# EAGLE board HW4 (EAGLE 9.6.2)
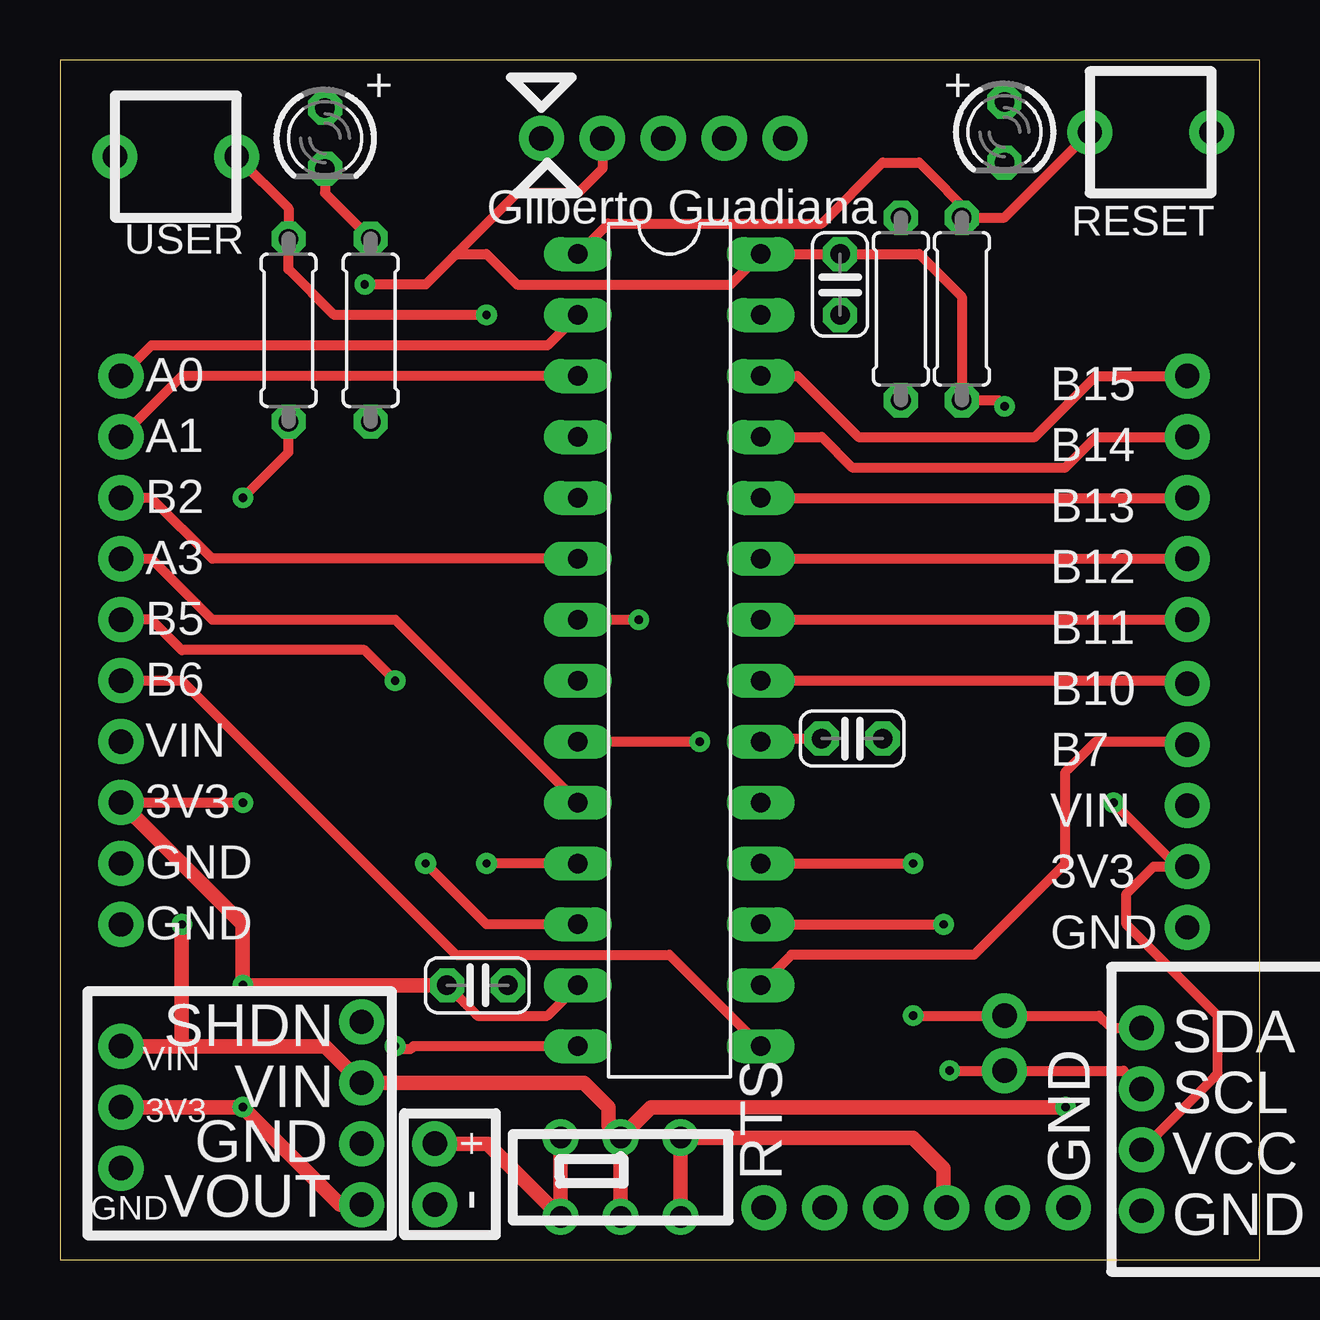
[diagram p0: board, top side]
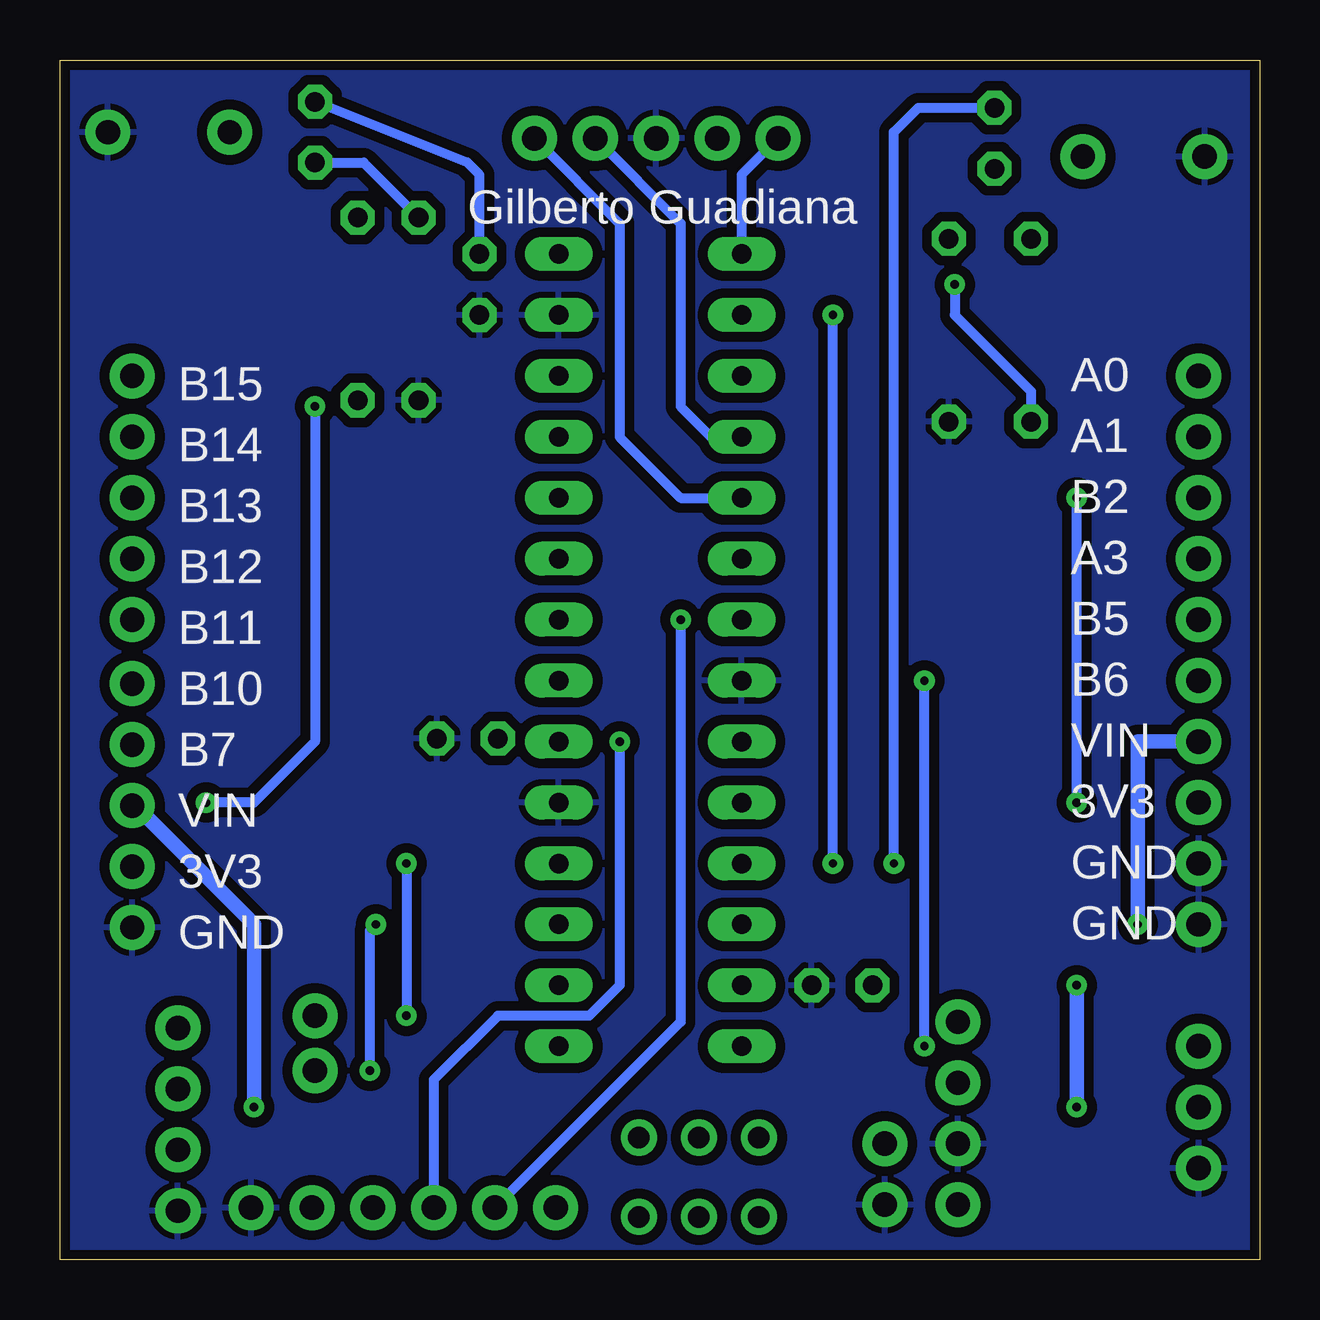
[diagram p1: board, bottom side, seen from below]

Size 50 x 50 mm. Coordinates in mm from the lower left corner, seen from the top.
Outline: 0,0 50,0 50,50 0,50 0,0
Copper layers (1*16): Top 0.035mm / dielectric 1.5mm / Bottom 0.035mm
Design rules "SparkFun": minimum track width 8mil, minimum drill 20mil, track to track 8mil, track to pad 8mil, pad to pad 8mil, via to via 8mil, smd to smd 8mil, copper to edge 8mil, drill to drill 8mil, minimum pad ring 12mil, minimum via ring 10mil, stop-mask expansion 4mil, vias tented up to drill 20mil, thermal gap 10mil

## Footprints (pad centres in the part's own frame; a part is rotated, then mirrored left to right if it is on the bottom)
C025-024X044 = drill 0.813 octagon: 1 -1.27,0; 2 1.27,0
LED3MM = drill 0.813 octagon: A -1.27,0; K 1.27,0
0207/7 = drill 0.813 octagon: 1 -3.81,0; 2 3.81,0
DIL28-3 = drill 0.813 long: 1 -16.51,-3.81; 2 -13.97,-3.81; 3 -11.43,-3.81; 4 -8.89,-3.81; 5 -6.35,-3.81; 6 -3.81,-3.81; 7 -1.27,-3.81; 8 1.27,-3.81; 9 3.81,-3.81; 10 6.35,-3.81; 11 8.89,-3.81; 12 11.43,-3.81; 13 13.97,-3.81; 14 16.51,-3.81; 15 16.51,3.81; 16 13.97,3.81; 17 11.43,3.81; 18 8.89,3.81; 19 6.35,3.81; 20 3.81,3.81; 21 1.27,3.81; 22 -1.27,3.81; 23 -3.81,3.81; 24 -6.35,3.81; 25 -8.89,3.81; 26 -11.43,3.81; 27 -13.97,3.81; 28 -16.51,3.81
BAT = drill 1.016 pad 1.88: 1 -1.27,0; 2 1.27,0
SLIDE = drill 0.9: 1 -2.5,-1.65; 2 0,-1.65; 3 2.5,-1.65; 4 2.5,1.65; 5 0,1.65; 6 -2.5,1.65
VREG = drill 1.016 pad 1.88: 1 -3.81,0; 2 -1.27,0; 3 1.27,0; 4 3.81,0
USBTOUART = drill 1.016 pad 1.88: 1 -6.35,0; 2 -3.81,0; 3 -1.27,0; 4 1.27,0; 5 3.81,0; 6 6.35,0
SNAP = drill 1.016 pad 1.88: 1 -5.08,0; 2 -2.54,0; 3 0,0; 4 2.54,0; 5 5.08,0
DISPLAY = drill 1.016 pad 1.88: 1 0,-3.81; 2 0,-1.27; 3 0,1.27; 4 0,3.81
BUTTON = drill 1.016 pad 1.88: 1 -2.54,0; 2 2.54,0
ONE = drill 1.016 pad 1.88: P$1 0,0
FIVE = drill 1.016 pad 1.88: 1 -5.08,0; 2 -2.54,0; 3 0,0; 4 2.54,0; 5 5.08,0

## Placement (x,y rotation side)
C1  0.1uF  [C025-024X044]  32.51,40.64 270 top
C2  10uF  [C025-024X044]  33.02,21.72 0 top
C3  0.1uF  [C025-024X044]  17.4,11.43 0 top
LED1  RED  [LED3MM]  39.37,46.99 270 top
LED2  GREEN  [LED3MM]  11.05,46.74 270 top
R1  330  [0207/7]  35.05,39.62 90 top
R2  330  [0207/7]  12.95,38.73 90 top
R3  10k  [0207/7]  37.59,39.62 270 top
R4  10k  [0207/7]  9.53,38.73 270 top
U$1  PIC32  [DIL28-3]  25.4,25.4 270 top
U$2  BAT  [BAT]  15.62,3.56 90 top
U$3  SLIDE  [SLIDE]  23.37,3.43 0 top
U$4  VREG  [VREG]  12.57,6.1 90 top
U$5  USBTOUART  [USBTOUART]  35.69,2.16 180 top
U$6  SNAP  [SNAP]  25.15,46.74 0 top
U$7  DISPLAY  [DISPLAY]  45.09,5.84 0 top
U$8  RESET  [BUTTON]  45.47,46.99 180 top
U$9  USER  [BUTTON]  4.83,45.97 0 top
U$10  ONE  [ONE]  39.37,10.16 0 top
U$11  ONE  [ONE]  39.37,7.87 0 top
U$12  FIVE  [FIVE]  46.99,31.75 90 top
U$13  FIVE  [FIVE]  46.99,18.92 90 top
U$14  FIVE  [FIVE]  2.54,19.05 90 top
U$15  FIVE  [FIVE]  2.54,31.75 90 top
U$16  ONE  [ONE]  2.54,8.89 0 top
U$17  ONE  [ONE]  2.54,6.35 0 top
U$18  ONE  [ONE]  2.54,3.81 0 top

## Library data of the parts
C1-C3 = HW4; SPICEPREFIX: C
LED1 LED2 U$1-U$18 = HW4
R1-R4 = HW4; SPICEPREFIX: R

## Nets
+3V3: C1.1 C3.1 LED1.A R3.2 R4.2 U$1.13 U$1.28 U$4.1 U$6.2 U$7.2 U$13.2 U$14.3 U$17.P$1
+5V: U$3.3 U$3.4 U$5.3
A0: U$1.2 U$15.5
A1: U$1.3 U$15.4
A3: U$1.10 U$15.2
A4: LED2.A U$1.12
B2: U$1.6 U$15.3
B4: R4.1 U$1.11 U$9.2
B5: U$1.14 U$15.1
B6: U$1.15 U$14.5
B7: U$1.16 U$13.4
B10: U$1.21 U$13.5
B11: U$1.22 U$12.1
B12: U$1.23 U$12.2
B13: U$1.24 U$12.3
B14: U$1.25 U$12.4
B15: U$1.26 U$12.5
GND: C1.2 C2.2 C3.2 R1.1 R2.1 U$1.8 U$1.19 U$1.27 U$2.1 U$4.2 U$5.1 U$6.3 U$7.1 U$8.1 U$9.1 U$13.1 U$14.1 U$14.2 U$18.P$1
MCLR: R3.1 U$1.1 U$6.1 U$8.2
N$1: U$2.2 U$3.1 U$3.6
N$2: LED1.K R1.2
N$4: C2.1 U$1.20
N$5: LED2.K R2.2
PGC: U$1.5 U$6.5
PGD: U$1.4 U$6.4
SCL: U$1.17 U$7.3 U$11.P$1
SDA: U$1.18 U$7.4 U$10.P$1
U1RX: U$1.9 U$5.4
U1TX: U$1.7 U$5.5
VIN: U$3.2 U$3.5 U$4.3 U$13.3 U$14.4 U$16.P$1

## Tracks (layer width: path | path; a pad name or v marks a point on that pad's centre or on a via)
+3V3  (via drill 0.35)
  Top 0.406: U$7.2 48.13,7.62 48.26,7.62 48.26,10.16 44.45,13.97 44.45,15.24 45.59,16.38 U$13.2 46.58,16.38 v43.91,19.05 | U$14.3 v7.62,19.05 | v7.62,31.75 9.53,33.66 R4.2 | U$6.2 22.61,45.47 21.59,44.45 19.05,44.45 16.51,41.91 | 16.51,41.91 15.24,40.64 v12.7,40.64 | v39.37,35.56 39.12,35.81 R3.2 37.59,40.13 35.81,41.91 C1.1 U$1.28 27.94,40.64 19.05,40.64 17.78,41.91 16.51,41.91 | C3.1 17.4,10.16 20.32,10.16 U$1.13
  Top 0.61: U$4.1 11.68,2.29 v7.62,6.35 U$17.P$1 | U$14.3 7.62,13.97 v7.62,11.43 C3.1
  Bottom 0.406: C1.1 32.51,45.21 33.02,45.72 LED1.A | U$6.2 22.86,46.48 | v7.62,19.05 v7.62,31.75 | v12.7,40.64 12.7,39.37 9.53,36.2 R4.2 | v39.37,35.56 39.37,21.59 41.91,19.05 v43.91,19.05
  Bottom 0.61: v7.62,6.35 v7.62,11.43
+5V
  Top 0.61: U$3.3 U$3.4 35.56,5.08 36.83,3.81 36.83,2.29 U$5.3
A0
  Top 0.406: U$1.2 20.32,38.1 3.81,38.1 U$15.5
A1
  Top 0.406: U$15.4 5.08,36.83 U$1.3
A3
  Top 0.406: U$15.2 3.81,29.21 6.35,26.67 13.97,26.67 U$1.10
A4  (via drill 0.35)
  Top 0.406: U$1.12 17.78,13.97 v15.24,16.51
  Bottom 0.406: LED2.A 14.22,48.01 15.24,46.99 v15.24,16.51
B2
  Top 0.406: U$15.3 3.81,31.75 6.35,29.21 U$1.6
B4  (via drill 0.35)
  Top 0.406: U$9.2 9.53,43.81 R4.1 9.53,41.27 11.43,39.37 v17.78,39.37 | U$1.11 v17.78,16.51
  Bottom 0.406: v17.78,16.51 v17.78,39.37
B5  (via drill 0.35)
  Top 0.406: U$1.14 14.73,8.89 14.61,8.76 14.1,8.76 v13.97,8.89 | v13.97,24.13 12.7,25.4 5.08,25.4 3.81,26.67 U$15.1
  Bottom 0.406: v13.97,8.89 v13.97,24.13
B6
  Top 0.406: U$1.15 25.4,12.7 16.51,12.7 5.08,24.13 U$14.5
B7
  Top 0.406: U$1.16 30.48,12.7 38.1,12.7 41.91,16.51 41.91,20.32 43.18,21.59 46.86,21.59 U$13.4
B10
  Top 0.406: U$1.21 46.86,24.13 U$13.5
B11
  Top 0.406: U$1.22 U$12.1
B12
  Top 0.406: U$1.23 U$12.2
B13
  Top 0.406: U$1.24 U$12.3
B14
  Top 0.406: U$1.25 31.75,34.29 33.02,33.02 41.91,33.02 43.18,34.29 U$12.4
B15
  Top 0.406: U$1.26 30.73,36.83 33.27,34.29 40.64,34.29 43.18,36.83 U$12.5
GND
  pour Bottom (isolate 0.406): 0,50.8 0,0 50.8,0 50.8,50.8
MCLR
  Top 0.406: R3.1 38.1,43.43 | 38.1,43.43 39.37,43.43 U$8.2 | U$1.1 22.86,43.18 31.75,43.18 34.29,45.72 35.81,45.72 38.1,43.43
  Bottom 0.406: U$6.1 21.59,45.21 U$1.1
N$1
  Top 0.61: U$3.6 U$3.1 17.82,4.83 U$2.2
N$2
  Bottom 0.406: LED1.K 37.34,45.72 R1.2
N$4
  Top 0.406: U$1.20 29.34,21.72 C2.1
N$5
  Top 0.406: LED2.K 11.05,44.45 R2.2
PGC
  Bottom 0.406: U$6.5 26.67,43.18 26.67,34.29 24.13,31.75 U$1.5
PGD
  Bottom 0.406: U$6.4 24.13,43.18 24.13,35.56 22.86,34.29 U$1.4
SCL  (via drill 0.35)
  Top 0.406: U$1.17 v36.83,13.97 | v37.08,7.87 U$11.P$1 44.32,7.87 U$7.3
  Bottom 0.406: v36.83,13.97 37.08,13.72 v37.08,7.87
SDA  (via drill 0.35)
  Top 0.406: U$1.18 v35.56,16.51 | v35.56,10.16 U$10.P$1 43.31,10.16 43.81,9.65 U$7.4
  Bottom 0.406: v35.56,16.51 v35.56,10.16
U1RX  (via drill 0.35)
  Top 0.406: U$1.9 v26.67,21.59
  Bottom 0.406: v26.67,21.59 26.67,11.43 27.94,10.16 31.75,10.16 34.42,7.49 U$5.4
U1TX  (via drill 0.35)
  Top 0.406: U$1.7 v24.13,26.67
  Bottom 0.406: U$5.5 24.13,9.91 v24.13,26.67
VIN  (via drill 0.35)
  Top 0.61: U$3.5 U$3.2 | U$3.5 22.86,5.59 22.86,6.35 21.84,7.37 U$4.3 11.05,8.89 5.08,8.89 | U$3.5 24.64,6.35 v41.91,6.35 | U$16.P$1 5.08,8.89 | 5.08,8.89 v5.08,13.97
  Bottom 0.61: v41.91,6.35 41.91,13.97 46.86,18.92 U$13.3 | v5.08,13.97 5.08,21.59 U$14.4

## Text on the board
tPlace: + | + | Gilberto Guadiana | A0 | B15 | A1 | B14 | B2 | B13 | A3 | B12 | B5 | B11 | B6 | B10 | VIN | B7 | 3V3 | VIN | GND | 3V3 | GND | GND | VIN | 3V3 | GND
bPlace: Gilberto Guadiana | A0 | B15 | A1 | B14 | B2 | B13 | A3 | B12 | B5 | B11 | B6 | B10 | VIN | B7 | 3V3 | VIN | GND | 3V3 | GND | GND